# EAGLE board doron3 (EAGLE 9.6.2)
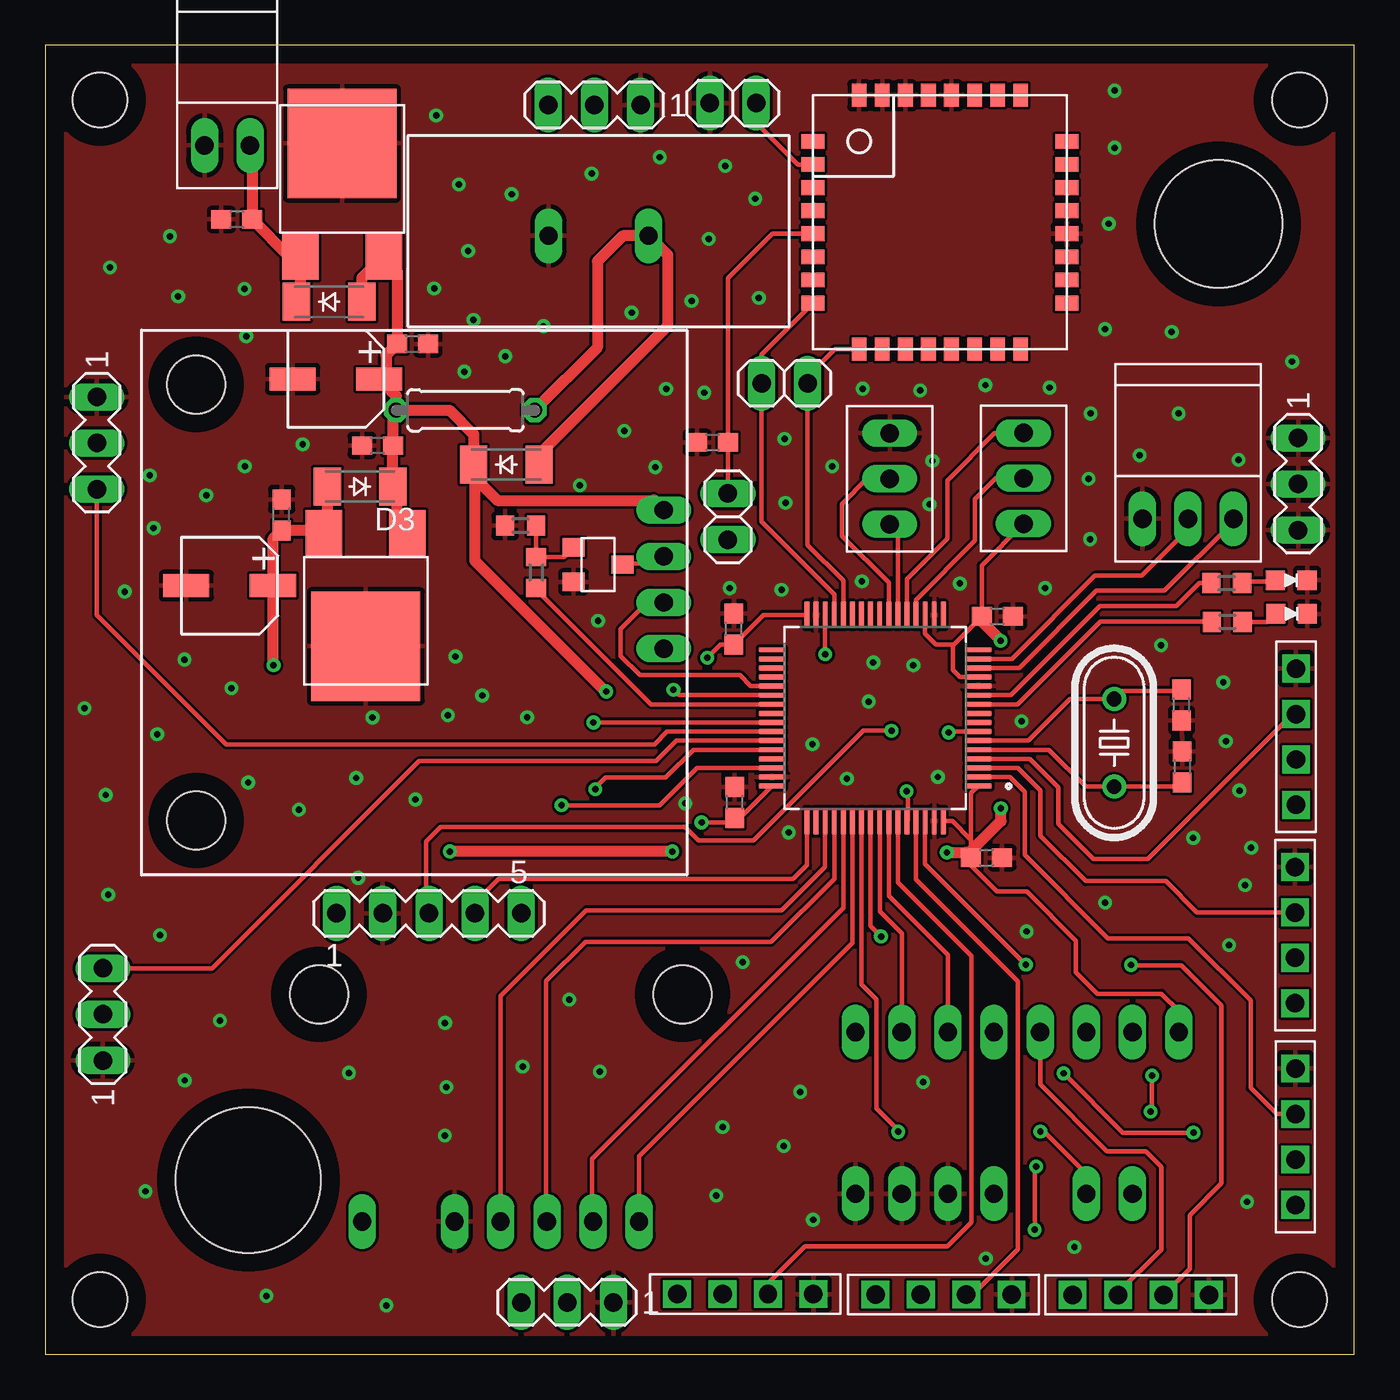
[diagram p0: board, top side]
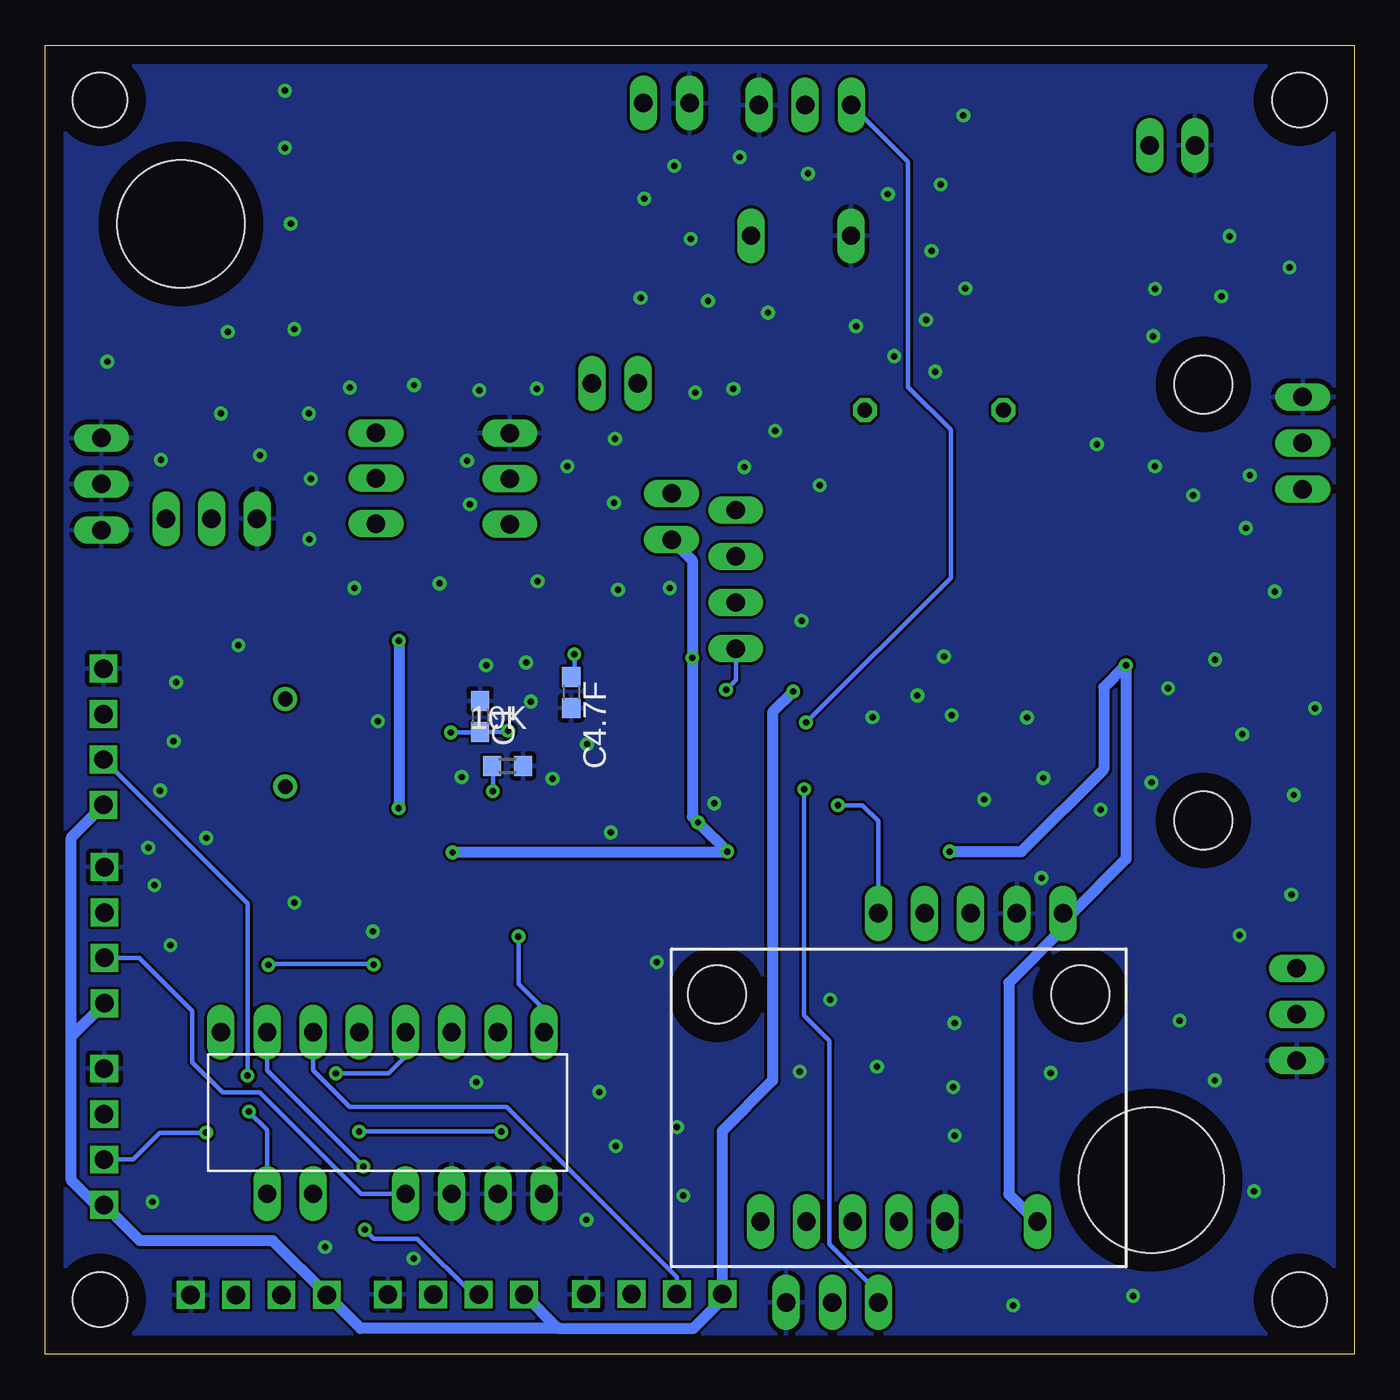
[diagram p1: board, bottom side, seen from below]

Size 72 x 72 mm. Coordinates in mm from the lower left corner, seen from the top.
Outline: 0,0 72,0 72,72 0,72 0,0
Copper layers (1*16): Top 0.035mm / dielectric 1.5mm / Bottom 0.035mm
Design rules "default": minimum track width 6mil, minimum drill 0.35mm, track to track 6mil, track to pad 6mil, pad to pad 6mil, via to via 6mil, smd to smd 6mil, copper to edge 40mil, drill to drill 6mil, minimum pad ring 10mil, minimum via ring 8mil, stop-mask expansion 4mil, vias tented up to drill 0mil, thermal gap 10mil
Holes 3 mm at 3,3 69,3 69,69 3,69
Holes 7 mm at 64.55,62.18
Holes 8 mm at 11.16,9.57

## Footprints (pad centres in the part's own frame; a part is rotated, then mirrored left to right if it is on the bottom)
C0603 = smd 1.1 x 1: 1 -0.85,0; 2 0.85,0
R0603 = smd 1 x 1.1: 1 -0.85,0; 2 0.85,0
HC49/S = drill 0.813: 1 -2.413,0; 2 2.413,0
UCD0J470MCL1GS = smd 1.27 x 2.54: P$1 0,2.38; P$2 0,-2.38
L_4 = drill 1.016 square: 1 3.75,0; 2 1.25,0; 3 -1.25,0; 4 -3.75,0
L_2 = drill 1.016 long: 1 1.25,0; 2 -1.25,0
L_3 = drill 1.016 long: 1 2.5,0; 2 0,0; 3 -2.5,0
AE-GPS-HOLE = drill 1 long: 5V -7.38,20.12; CLK -7.38,12.5; CS -7.38,4.88; GND -7.38,15.04; SI -7.38,7.42; SO -7.38,9.96 | hole 3.2: 5.12,22.5; 5.12,2.5
SOD-123_MINI-SMA = smd 1.5 x 2.1: A 1.8,0; C -1.8,0
LED1608 = smd 1.05 x 1.08: A -0.875,0; K 0.875,0
MULTI = drill 1 long: 3V30 7.62,19.05; GND1 -1.27,1.27; GND2 -1.27,3.81; GND3 -1.27,6.35; OUTINPUT -1.27,13.97; S0 7.62,6.35; S1 7.62,3.81; S2 7.62,1.27; Y0 7.62,11.43; Y1 7.62,13.97; Y2 7.62,16.51; Y3 7.62,8.89; Y5 -1.27,8.89; Y6 -1.27,16.51
0207/7 = drill 0.813 octagon: 1 -3.81,0; 2 3.81,0
1X02 = drill 1.016 long: 1 -1.27,0; 2 1.27,0
MA05-1 = drill 1.016 long: 1 -5.08,0; 2 -2.54,0; 3 0,0; 4 2.54,0; 5 5.08,0
MA03-1 = drill 1.016 long: 1 -2.54,0; 2 0,0; 3 2.54,0
QFP50P1200X1200X160-64N = smd 1.47 x 0.28: 1 -5.67,3.75; 2 -5.67,3.25; 3 -5.67,2.75; 4 -5.67,2.25; 5 -5.67,1.75; 6 -5.67,1.25; 7 -5.67,0.75; 8 -5.67,0.25; 9 -5.67,-0.25; 10 -5.67,-0.75; 11 -5.67,-1.25; 12 -5.67,-1.75; 13 -5.67,-2.25; 14 -5.67,-2.75; 15 -5.67,-3.25; 16 -5.67,-3.75; 33 5.67,-3.75; 34 5.67,-3.25; 35 5.67,-2.75; 36 5.67,-2.25; 37 5.67,-1.75; 38 5.67,-1.25; 39 5.67,-0.75; 40 5.67,-0.25; 41 5.67,0.25; 42 5.67,0.75; 43 5.67,1.25; 44 5.67,1.75; 45 5.67,2.25; 46 5.67,2.75; 47 5.67,3.25; 48 5.67,3.75 | smd 0.28 x 1.47: 17 -3.75,-5.67; 18 -3.25,-5.67; 19 -2.75,-5.67; 20 -2.25,-5.67; 21 -1.75,-5.67; 22 -1.25,-5.67; 23 -0.75,-5.67; 24 -0.25,-5.67; 25 0.25,-5.67; 26 0.75,-5.67; 27 1.25,-5.67; 28 1.75,-5.67; 29 2.25,-5.67; 30 2.75,-5.67; 31 3.25,-5.67; 32 3.75,-5.67; 49 3.75,5.67; 50 3.25,5.67; 51 2.75,5.67; 52 2.25,5.67; 53 1.75,5.67; 54 1.25,5.67; 55 0.75,5.67; 56 0.25,5.67; 57 -0.25,5.67; 58 -0.75,5.67; 59 -1.25,5.67; 60 -1.75,5.67; 61 -2.25,5.67; 62 -2.75,5.67; 63 -3.25,5.67; 64 -3.75,5.67
LITE = smd 1.27 x 0.813: P$1 0,11.43; P$2 0,10.16; P$3 0,8.89; P$4 0,7.62; P$5 0,6.35; P$6 0,5.08; P$7 0,3.81; P$8 0,2.54; P$17 13.97,2.54; P$18 13.97,3.81; P$19 13.97,5.08; P$20 13.97,6.35; P$21 13.97,7.62; P$22 13.97,8.89; P$23 13.97,10.16; P$24 13.97,11.43 | smd 0.813 x 1.27: P$9 2.54,0; P$10 3.81,0; P$11 5.08,0; P$12 6.35,0; P$13 7.62,0; P$14 8.89,0; P$15 10.16,0; P$16 11.43,0; P$25 11.43,13.97; P$26 10.16,13.97; P$27 8.89,13.97; P$28 7.62,13.97; P$29 6.35,13.97; P$30 5.08,13.97; P$31 3.81,13.97; P$32 2.54,13.97
AE-GPS-HOLE' = drill 1 long: 5V 13.73,5.08; GND 13.73,2.54; RXD 13.73,0; TXD 13.73,-2.54 | hole 3.2: -12,-12; -12,12
NJM2391DL1-33 = smd 6 x 6: GND 0,1.4 | smd 2 x 2.5: IN -2.3,-4.85; OUT 2.3,-4.85
L_32 = drill 1.016 long: 1 2.5,0; 2 0,0; 3 -2.5,0
SSM3K329R = smd 1 x 1.2: P$1 -0.95,-1.3; P$2 0.95,-1.3; P$3 0,1.4
VEC5R4355QG-I = drill 1 long: P$1 0,2.75; P$2 0,-2.75

## Placement (x,y rotation side)
0.1F  [C0603]  37.92,30.36 90 top
0.1F1  [C0603]  51.78,27.31 0 top
0.1F2  [C0603]  37.87,39.89 90 top
0.1F3  [C0603]  52.37,40.59 0 top
0.33  [C0603]  18.27,49.99 180 top
0.33H  [C0603]  20.19,55.58 0 top
0.33U  [C0603]  10.53,62.43 180 top
2.2  [C0603]  12.99,46.17 90 top
10K  [R0603]  46.58,32.36 0 bottom
12MHZ  [HC49/S]  58.8,33.63 270 top
20  [C0603]  62.54,32.3 270 top
20PF  [C0603]  62.51,35.71 90 top
47  UCD0J470MCL1GS  [UCD0J470MCL1GS]  10.13,42.28 270 top
47U  UCD0J470MCL1GS  [UCD0J470MCL1GS]  15.98,53.65 270 top
C1  [C0603]  48.09,35.09 270 bottom
C2  [C0603]  36.7,50.16 0 top
C4.7F  [C0603]  43.07,36.41 270 bottom
CON1  L4  [L_4]  60.26,3.26 0 top
CON2  [L_2]  10,66.5 180 top
CON3  [L_3]  62.86,45.96 180 top
CON4  L4  [L_4]  38.5,3.3 0 top
CON5  L4  [L_4]  49.42,3.28 0 top
CON6  L4  [L_4]  68.77,11.96 90 top
CON7  L4  [L_4]  68.8,33.96 90 top
CON8  L4  [L_4]  68.75,23.05 90 top
CS1  [AE-GPS-HOLE]  37.55,14.68 90 top
D1  CGRM4001-G  [SOD-123_MINI-SMA]  15.61,57.9 0 top
D2  CGRM4001-G  [SOD-123_MINI-SMA]  25.36,48.94 0 top
D3  CGRM4001-G  [SOD-123_MINI-SMA]  17.31,47.73 180 top
LED1  LED1608  [LED1608]  68.54,42.58 0 top
LED2  LED1608  [LED1608]  68.56,40.72 0 top
OUTPUT  MULTI  [MULTI]  43.3,10.09 90 bottom
R1  [R0603]  27.01,43 90 top
R2  [0207/7]  23.11,51.93 0 top
R3  [R0603]  26.14,45.58 0 top
R5  [R0603]  65.02,40.28 180 top
R6  [R0603]  64.99,42.41 180 top
RESET  [1X02]  37.83,68.83 180 top
SOURCE  [1X02]  37.55,46.08 90 top
SV1  [MA05-1]  21.1,24.25 0 top
SV2  [MA03-1]  30.2,68.72 180 top
SV3  [MA03-1]  2.83,50.12 270 top
SV4  [MA03-1]  3.16,18.69 90 top
SV5  [MA03-1]  28.71,2.85 180 top
SV6  [MA03-1]  68.92,47.87 270 top
U1  STM32F722RET6  [QFP50P1200X1200X160-64N]  45.65,35 180 top
U$1  LITE  [LITE]  42.23,55.29 0 top
U$3  AE-GPS-HOLE  [AE-GPS-HOLE']  20.29,41.35 0 top
U$4  NJM2391DL1-33  [NJM2391DL1-33]  17.62,40.34 180 top
U$5  L32  [L_32]  46.46,48.16 90 top
U$6  L32  [L_32]  53.81,48.18 90 top
U$7  SSM3K329R  [SSM3K329R]  30.36,43.44 270 top
U$8  VEC5R4355QG-I  [VEC5R4355QG-I]  30.43,61.53 270 top
U$9  NJM2391DL1-33  [NJM2391DL1-33]  16.32,65.21 0 top
USART3  [1X02]  40.67,53.41 180 top

## Library data of the parts
0.1F 0.1F1-0.1F3 0.33 0.33H 0.33U 2.2 20 20PF C1 C2 C4.7F = rcl; SPICEPREFIX: C
10K R1-R3 R5 R6 = rcl; SPICEPREFIX: R
12MHZ = crystal; OC_FARNELL: 1667008; OC_NEWARK: unknown; SPICEPREFIX: B
47 47U = chip-capacitor
CON1-CON8 U$4-U$6 U$9 = CREATE_sensor_dip
CS1 = DP310
D1-D3 = diode
LED1 LED2 = generic
OUTPUT = multiprexer
RESET SOURCE USART3 = pinhead
SV1-SV6 = con-lstb; OC_FARNELL: unknown; OC_NEWARK: unknown
U1 = STM32F722RET6; AVAILABILITY: In Stock; DESCRIPTION: ARM® Cortex®-M7 STM32F7 Microcontroller IC 32-Bit Single-Core 216MHz 512KB (512K x 8) FLASH 64-LQFP (10x10); MF: STMicroelectronics; MP: STM32F722RET6; PACKAGE: LQFP-64 STMicroelectronics; PRICE: None; PURCHASE-URL: https://pricing.snapeda.com/search/part/STM32F722RET6/?ref=eda
U$1 = TWELite
U$3 = AE-GPS-HOLE
U$7 = SSM3K329R
U$8 = VEC5R4355QG-I

## Nets
+3V3 [New Class]: 0.1F1.1 0.1F2.1 0.1F3.1 0.1F.1 2.2.1 47.P$1 CS1.5V D3.A OUTPUT.3V30 SOURCE.1 SV1.1 U1.1 U1.13 U1.19 U1.32 U1.48 U1.64 U$4.OUT U$6.3
+5V [New Class]: 0.33.1 0.33H.1 47U.P$1 CON1.4 CON4.4 CON5.4 CON6.4 CON7.4 CON8.4 D1.A D2.C D3.C R2.1 U$3.5V U$4.IN U$9.OUT
CLK3: CS1.CLK U1.51
GND: 0.1F1.2 0.1F2.2 0.1F3.2 0.1F.2 0.33.2 0.33H.2 0.33U.2 2.2.2 10K.2 20.1 20PF.1 47.P$2 47U.P$2 C1.1 C2.1 C4.7F.2 CON1.1 CON2.1 CON3.1 CON4.1 CON5.1 CON6.1 CON7.1 CON8.1 CS1.GND LED1.K LED2.K OUTPUT.GND1 OUTPUT.GND2 OUTPUT.GND3 R3.1 RESET.2 SV1.2 SV2.1 SV3.1 SV4.1 SV5.1 SV6.1 SV6.2 SV6.3 U1.12 U1.18 U1.31 U1.47 U1.63 U$1.P$20 U$1.P$28 U$1.P$30 U$1.P$31 U$1.P$32 U$4.GND U$5.1 U$7.P$2 U$8.P$2 U$9.GND
GPSGND: U$3.GND U$7.P$3
MISO1: U1.22 U$5.3
MISO3: CS1.SO U1.52
MOSI1: U1.23 U$5.2
MOSI3: CS1.SI U1.53
MPUCS: U1.20 U$6.2
N$1: 10K.1 U1.60
N$2: OUTPUT.OUTINPUT U1.55
N$3: LED2.A R5.1
N$4: C4.7F.1 U1.30
N$5: SV1.5 U1.46
N$6: SV1.4 U1.49
N$7: U1.29 U$1.P$8 USART3.2
N$8: CS1.CS U1.54
N$9: U1.28 U$1.P$9 USART3.1
N$10: C2.2 SOURCE.2 U$1.P$5
N$11: RESET.1 U$1.P$2
N$13: SV2.3 U1.41
N$14: SV3.3 U1.42
N$15: SV4.3 U1.43
N$16: SV5.3 U1.44
N$17: R6.2 U1.11
N$18: LED1.A R6.1
N$19: 12MHZ.1 20PF.2 U1.6
N$20: CON5.2 U1.61
N$21: CON1.2 U1.62
N$22: CON3.3 U1.14
N$23: CON8.2 U1.3
N$24: OUTPUT.S0 U1.58
N$25: OUTPUT.S1 U1.57
N$26: OUTPUT.S2 U1.56
N$27: CON3.2 U1.15
N$28: R5.2 U1.10
N$29: R1.1 U1.39
N$30: CON8.3 OUTPUT.Y5
N$31: D2.A R2.2 U$8.P$1
N$32: CON7.3 OUTPUT.Y6
N$33: R1.2 R3.2 U$7.P$1
N$35: CON7.2 U1.4
N$36: CON6.3 OUTPUT.Y3
N$37: CON6.2 U1.2
N$38: CON5.3 OUTPUT.Y2
N$40: CON4.3 OUTPUT.Y1
N$41: CON4.2 U1.59
N$42: CON1.3 OUTPUT.Y0
NRST: C1.2 SV1.3 U1.7
PH0_OSC_IN: 12MHZ.2 20.2 U1.5
SCK1: U1.21 U$6.1
UART6RX: U1.38 U$3.TXD
UART6TX: U1.37 U$3.RXD
VCC: 0.33U.1 CON2.2 D1.C U$9.IN

## Tracks (layer width: path | path; a pad name or v marks a point on that pad's centre or on a via)
+3V3  (via drill 0.35)
  Top 0.254: U1.13 50.3,37.25 49.92,37.62 49.92,38.99 49.98,39.05 | U1.19 48.4,39.65 49,39.05 49.98,39.05 | U1.32 39.5,40.67 0.1F2.1 37.14,39.04 v36.41,38.31 | 49.98,39.05 51.38,40.45 0.1F3.1 51.52,43.39 U$6.3 | 50.93,28.3 0.1F1.1 50.93,26.88 52.35,25.46 53.99,25.46 56.7,22.74 56.7,20.99 57.86,19.83 61.41,19.83 62.35,18.88 OUTPUT.3V30 | 50.93,28.3 50.93,30.86 U1.1 | U1.64 49.9,29.33 50.93,28.3 | U1.48 39.96,31.25 38.22,29.51 0.1F.1 37.67,29.26 v36.11,29.26 v36.1,29.25
  Top 0.61: D3.A 15.51,45.38 U$4.OUT 15.2,45.32 2.2.1 12.51,44.84 47.P$1 12.51,37.94 v12.55,37.9 | v52.57,30.04 52.57,29.33 50.93,27.69 0.1F1.1 50.64,27.6 v49.6,27.6 | v34.49,27.65 v22.25,27.65 | v52.55,39.25 52.55,39.28 51.38,40.45
  Bottom 0.61: v49.6,27.6 34.49,27.6 v34.49,27.65 36.09,29.25 v36.1,29.25 36.41,29.56 v36.41,38.31 36.41,43.67 SOURCE.1 | v52.57,30.04 52.55,30.06 v52.55,39.25 | v22.25,27.65 18.3,27.65 13.78,32.17 13.78,36.67 v12.55,37.9 12.55,27.23 15.53,24.25 SV1.1 16.02,23.42 19,20.43 19,8.8 17.5,7.29 CS1.5V
+5V  (via drill 0.35)
  Top 0.61: D2.C 23.56,50.6 22.23,51.93 R2.1 | U$4.IN 19.92,45.33 19.35,45.9 19.35,47.49 D3.C 19.07,47.77 19.07,49.94 0.33.1 19.12,51.75 R2.1 | U$3.5V 33.46,46.99 33.42,46.96 24.87,46.96 23.56,48.28 D2.C | D2.C 23.62,48.88 23.62,43.65 30.82,36.45 v30.86,36.45 | 47U.P$1 18.73,53.28 | 18.73,53.28 19.3,52.71 R2.1 | 18.73,53.28 18.73,54.97 0.33H.1 19.34,59.64 U$9.OUT 18.57,60.36 17.41,59.2 D1.A
  Bottom 0.61: v30.86,36.45 31.99,35.32 31.99,15.05 34.78,12.27 34.78,3.32 CON4.4 34.75,3.02 36.37,1.41 43.65,1.41 | 70.58,17.47 70.58,9.56 69.23,8.21 CON6.4 66.8,6.23 59.49,6.23 CON1.4 54.67,1.42 43.66,1.42 43.65,1.41 | 70.58,17.47 CON8.4 | 70.58,17.47 70.58,28.44 CON7.4 | 43.65,1.41 43.79,1.41 CON5.4
CLK3
  Top 0.254: U1.51 42.89,26.8 40.5,24.41 29.76,24.41 25.05,19.7 CS1.CLK
GND  (via drill 0.35)
  other vias: 35.2,30.3 42.2,33.55 40.9,28.7 3.32,30.76 16.69,15.47 21.98,18.22 6.3,23.05 7.64,38.21 10.23,36.63 4.36,41.95 25.3,54.9 31.85,50.8 30.4,40.35 22.05,14.69 17.2,26.2 66,25.8 33.55,48.8 61.38,38.99 53.7,34.82 60.2,49.45 44.96,53.11 57.4,48.15 33.8,65.85 58.5,62.19 57.5,51.75 39.05,63.57 36.5,61.35 23.25,60.7 22.75,64.35 3.45,25.28 5.95,45.45 12.16,3.2 37.65,42.15 44.93,42.52 56.61,5.89 28.82,19.5 22.56,38.38 47.75,37.9 45.3,35.9 44.1,31.65 50.32,42.4 55,42.15 26.5,35.03 65.69,31 11.05,56 13.95,29.95 17.09,31.7 48.8,49.14 40.5,42.05 63.15,28.4 40.66,50.35 2.14,35.53 18,35.02 58.82,66.37 36.25,52.9 51.72,53.31 58.83,69.51 25.65,63.82 39.25,58.11 35.55,57.95 8.85,47.24 6.15,34.1 57.48,44.84 64.95,33.71 51.74,5.25 58.3,56.39 21.97,12.02 24.03,36.23 5.5,8.96 10.96,48.84 29.4,47.8 49.1,31.75 40.72,46.84 11.15,31.45 30.05,64.95 61.97,56.24 65.65,49.2 64.81,36.96 36.9,8.72 22.14,35.15 37.4,65.38 55.25,53.17 5.74,48.35 6.85,61.5 7.3,58.19 10.95,58.6 32.25,57.3 21.39,58.63 62.35,51.75 48.12,53.02 58.3,24.83 48.64,46.75 43.28,48.85 27.4,56.55 34.15,53.1 18.76,2.68 45.55,38.05 21.5,68.15 23.05,54.05 23.55,56.9 14.15,50.05 41.52,14.42 66.11,8.38 65.12,22.49 66.34,27.86 53.98,23.25 38.37,21.56 30.5,15.54 26.25,15.82 7.66,15.06 20.36,30.52 9.6,18.34 3.56,59.78 40.62,11.44 48.3,14.96 42.23,7.39 37.26,12.49 68.6,54.6
  pour Top: 75.1,-2.8 -2.65,-2.8 -2.65,74.95 75.1,74.95
  pour Bottom: 73.7,-1.75 -1.35,-1.75 -1.35,73.35 73.7,73.35
GPSGND
  Top 0.254: U$3.GND 33.62,43.49 31.81,43.49 U$7.P$3
MISO1
  Top 0.254: U1.22 46.9,45.22 U$5.3
MISO3
  Top 0.254: U1.52 43.4,26.16 39.93,22.69 29.71,22.69 27.55,20.53 27.55,7.33 CS1.SO
MOSI1
  Top 0.254: U1.23 46.4,42.44 43.83,45.02 43.83,46.78 45.21,48.16 U$5.2
MOSI3
  Top 0.254: U1.53 43.9,24.55 30.08,10.73 30.08,7.34 CS1.SI
MPUCS
  Top 0.254: U1.20 47.9,41.5 51.15,44.75 51.15,47.05 52.28,48.18 U$6.2
N$1  (via drill 0.35)
  Top 0.254: v47.38,30.97 47.45,30.9 47.45,29.38 U1.60
  Bottom 0.254: 10K.1 47.38,32.31 v47.38,30.97
N$2  (via drill 0.35)
  Top 0.254: v46.92,12.23 46.96,12.27 45.72,13.51 45.72,19.51 44.9,20.33 U1.55 | OUTPUT.OUTINPUT 57.27,9.91 54.94,12.24 v54.74,12.24
  Bottom 0.254: v54.74,12.24 46.94,12.24 v46.92,12.23
N$3
  Top 0.254: LED2.A 67.24,40.28 R5.1
N$4  (via drill 0.35)
  Top 0.254: v42.9,38.5 U1.30
  Bottom 0.254: C4.7F.1 42.9,37.43 v42.9,38.5
N$5  (via drill 0.35)
  Top 0.254: v28.39,30.2 33.8,30.2 35.85,32.25 U1.46
  Bottom 0.254: v28.39,30.2 27.05,30.2 26.18,29.32 SV1.5
N$6
  Top 0.254: U1.49 41.9,26.9 41.14,26.14 24.94,26.14 23.64,24.84 SV1.4
N$7
  Top 0.254: U1.29 43.4,41.8 39.4,45.8 USART3.2 39.4,55 U$1.P$8
N$8
  Top 0.254: CS1.CS 32.65,7.31 32.65,10.87 44.39,22.61 44.39,29.32 U1.54
N$9
  Top 0.254: U$1.P$9 43.43,55.29 41.94,53.8 USART3.1 41.94,44.51 43.9,42.55 U1.28
N$10
  Top 0.254: U$1.P$5 39.99,61.64 37.55,59.2 C2.2 SOURCE.2
N$11
  Top 0.254: U$1.P$2 41.4,65.45 39.1,67.75 RESET.1
N$13  (via drill 0.35)
  Top 0.254: U1.41 v30.15,34.75
  Bottom 0.254: v30.15,34.75 22.19,42.71 22.19,50.86 24.54,53.21 24.54,65.59 SV2.3
N$14
  Top 0.254: SV3.3 2.83,40.66 9.93,33.55 33.5,33.55 34.2,34.25 U1.42
N$15
  Top 0.254: U1.43 34.73,33.75 33.61,32.62 20.57,32.62 9.17,21.23 SV4.3
N$16  (via drill 0.35)
  Top 0.254: U1.44 35.65,33.25 34.12,31.72 30.8,31.72 30.25,31.17 v30.25,31.07
  Bottom 0.254: v30.25,31.07 30.25,18.63 28.86,17.23 28.86,6.05 26.17,3.36 SV5.3
N$17
  Top 0.254: R6.2 63.48,42.41 62.23,41.16 58.02,41.16 53.11,36.25 U1.11
N$18
  Top 0.254: R6.1 65.93,42.51 67.66,42.51 LED1.A
N$19
  Top 0.254: U1.6 54.08,33.75 56.37,36.04 12MHZ.1 59.23,36.48 62.43,36.48 20PF.2
N$20
  Top 0.254: U1.61 47.88,29.31 47.88,26.13 53.5,20.51 53.5,5.75 51.03,3.28 CON5.2
N$21  (via drill 0.35)
  Top 0.254: U1.62 48.4,26.96 v53.94,21.42 | CON1.2 62.96,4.7 62.96,7.65 64.69,9.38 64.69,19.18 62.5,21.37 59.76,21.37 v59.73,21.41
  Bottom 0.254: v59.73,21.41 59.63,21.31 59.47,21.47 53.99,21.47 v53.94,21.42
N$22
  Top 0.254: U1.14 53.59,37.75 57.83,42 61.57,42 65.36,45.79 CON3.3
N$23
  Top 0.254: U1.3 53.49,32.25 54.74,31 54.74,28.51 57.23,26.02 61.64,26.02 63.36,24.3 CON8.2
N$24
  Top 0.254: U1.58 46.4,25.2 49.65,21.95 OUTPUT.S0
N$25
  Top 0.254: U1.57 45.9,24.36 47.11,23.16 OUTPUT.S1
N$26  (via drill 0.35)
  Top 0.254: U1.56 45.4,23.55 v45.98,22.98
  Bottom 0.254: v45.98,22.98 45.98,20.38 44.57,18.97 OUTPUT.S2
N$27
  Top 0.254: U1.15 53.17,38.25 57.75,42.82 60.32,42.82 62.86,45.36 CON3.2
N$28
  Top 0.254: R5.2 64.15,40.3 58.03,40.3 53.48,35.75 U1.10
N$29
  Top 0.254: U1.39 33.33,35.75 27.01,42.07 R1.1
N$30
  Bottom 0.254: CON8.3 66.84,21.8 63.91,18.87 63.91,16.05 62.26,14.4 60.2,14.4 54.62,8.82 OUTPUT.Y5
N$31
  Top 0.61: R2.2 30.37,55.38 30.37,60.13 31.77,61.53 U$8.P$1 34.23,60.48 34.23,56.57 27.16,49.49 D2.A
N$32  (via drill 0.35)
  Top 0.254: v60.88,15.32 60.88,13.41 v60.81,13.34
  Bottom 0.254: CON7.3 60.88,24.8 v60.88,15.32 | v60.81,13.34 60.81,13.32 59.81,12.32 OUTPUT.Y6
N$33
  Top 0.254: U$7.P$1 28.52,43.85 R1.2 26.99,43.87 R3.2
N$35
  Top 0.254: U1.4 54.17,32.75 55.74,31.18 55.74,29.16 57.66,27.25 60.65,27.25 68.18,34.77 68.36,34.77 CON7.2
N$36  (via drill 0.35)
  Top 0.254: v63.16,12.18 59.29,12.18 v56.02,15.45
  Bottom 0.254: v56.02,15.45 53.12,15.45 52.18,16.38 OUTPUT.Y3 | CON6.3 67.18,10.71 65.71,12.18 v63.16,12.18
N$37
  Top 0.254: CON6.2 67.73,13.21 66.31,14.64 66.31,19.45 62.87,22.88 58.45,22.88 53.89,27.45 53.89,30.92 53.06,31.75 U1.2
N$38  (via drill 0.35)
  Top 0.254: v54.5,10.31 54.44,10.24 54.44,6.85 v54.43,6.84
  Bottom 0.254: OUTPUT.Y2 59.81,15.62 v54.5,10.31 | CON5.3 48.46,3.28 51.54,6.36 53.94,6.36 v54.43,6.84
N$40
  Bottom 0.254: OUTPUT.Y1 57.27,15.61 55.25,13.59 46.62,13.59 37.25,4.23 CON4.3
N$41
  Top 0.254: U1.59 46.9,25.94 50.94,21.9 50.94,7.26 49.62,5.93 41.8,5.93 39.75,3.89 CON4.2
N$42
  Top 0.254: CON1.3 59.01,3.36 61.4,5.74 61.4,10.29 60.53,11.16 58.41,11.16 54.73,14.84 OUTPUT.Y0
NRST  (via drill 0.35)
  Top 0.254: U1.7 49.75,34.25 v49.7,34.2 | SV1.3 20.93,24.41 20.93,28.19 21.74,29 35.19,29 35.94,28.25 38.95,28.25 45,34.3 v46.55,34.3
  Bottom 0.254: v49.7,34.2 48.13,34.2 C1.2 46.61,34.24 v46.55,34.3
PH0_OSC_IN
  Top 0.254: U1.5 55.2,33.25 57.24,31.22 12MHZ.2 62.3,31.22 20.2
SCK1
  Top 0.254: U$6.1 52.22,50.68 49.61,48.07 49.61,44.87 47.4,42.65 U1.21
UART6RX  (via drill 0.35)
  Top 0.254: v34.55,36.55 34.85,36.25 U1.38
  Bottom 0.254: v34.55,36.55 34.02,37.08 U$3.TXD
UART6TX
  Top 0.254: U1.37 38.8,36.75 38.2,37.35 32.7,37.35 31.65,38.4 31.65,39.9 33.1,41.35 U$3.RXD
VCC
  Top 0.61: CON2.2 11.38,66.37 0.33U.1 13.45,60.36 U$9.IN 14.02,58.11 D1.C